# Altium PCB QTRX_PCB_Demo_FireFly_1p3Lens.PcbDoc
Units mil, origin at the board's own origin, x right, y up, seen from the top; angles counter-clockwise.
Board outline 630.74 x 411.45 mil, 6 copper layers (Top Layer, GND1, VCC(2V5), signal_VCC1V2, GND2, Bottom Layer), stack 37.5 mil thick; 33 components, 47 nets, 157 pads, 52 vias.
Unrouted connection lines stored in the file: 40.
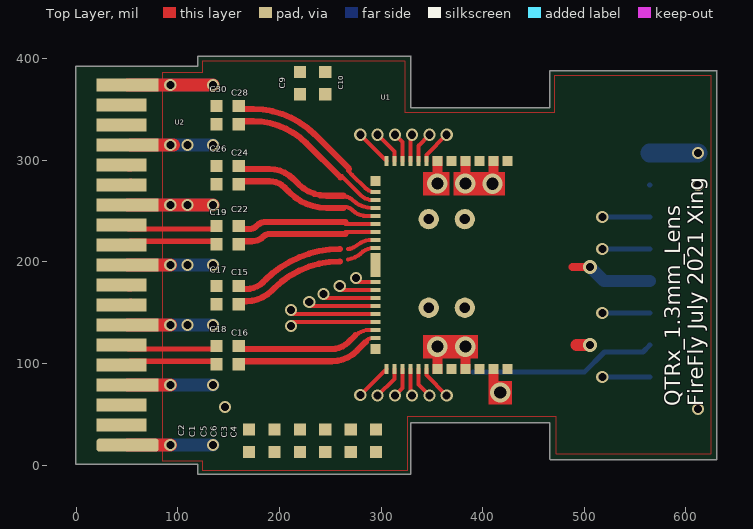
[diagram p0: Top Layer view]
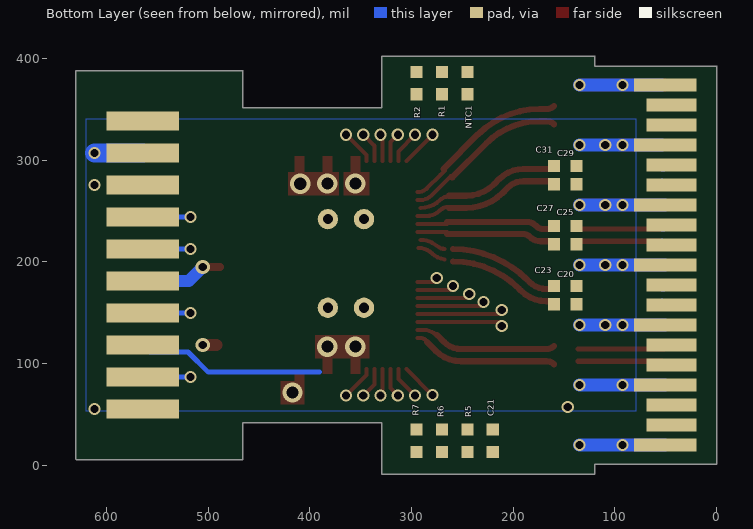
[diagram p1: Bottom Layer view, seen from below]
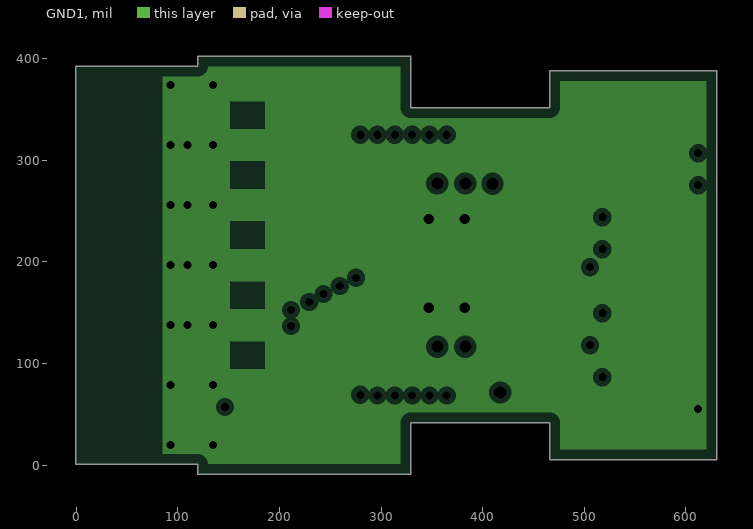
[diagram p2: GND1, clearances drawn from the general rule]
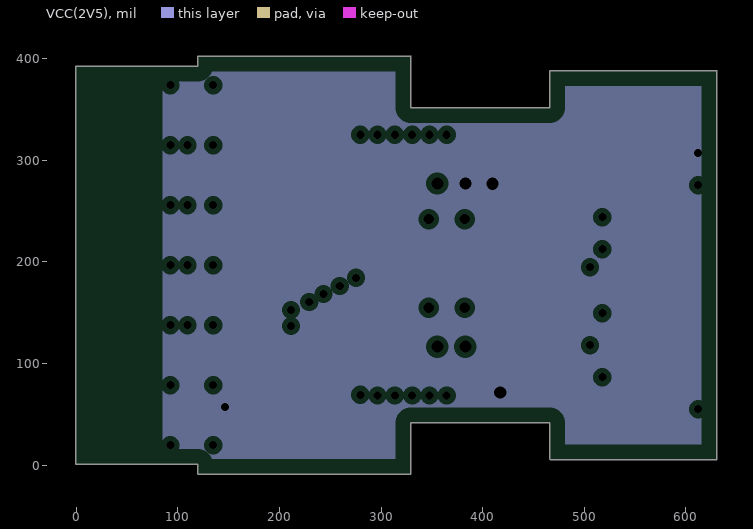
[diagram p3: VCC(2V5), clearances drawn from the general rule]
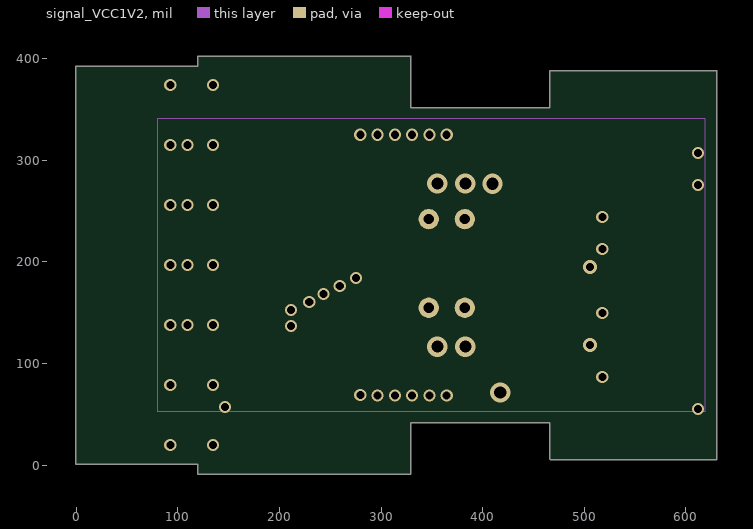
[diagram p4: signal_VCC1V2]
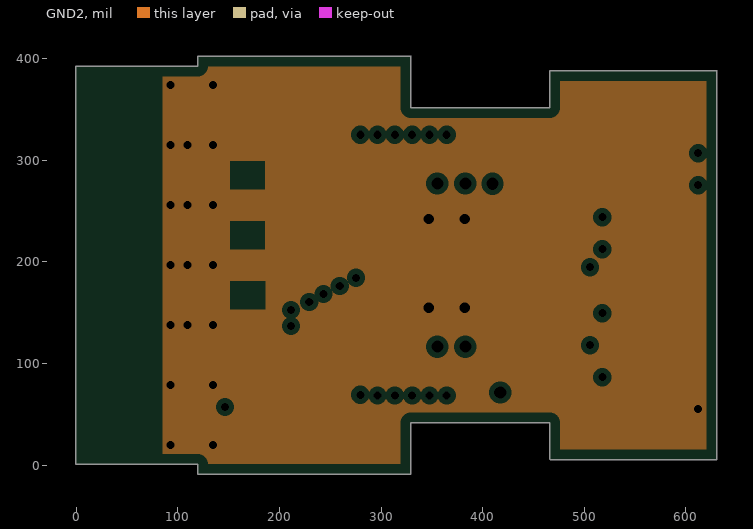
[diagram p5: GND2, clearances drawn from the general rule]

## Layer stack, top to bottom
Top Solder: solder mask 0.7, Solder Resist, Dk 3.5
Top Layer: signal copper 1.65
Dielectric 1: core 4, CORE NPG 186, Dk 4.6
GND1: plane copper 0.6, net GND
Dielectric 2: prepreg 8.3, PREPREG 7628HR, Dk 4.1
VCC(2V5): plane copper 1.2, net VCC2V5
Dielectric 3: dielectric 6, FR-4, Dk 4.8
signal_VCC1V2: signal copper 1.2
Dielectric 4: prepreg 8.3, PREPREG 7628HR, Dk 4.1
GND2: plane copper 0.6, net GND
Dielectric 5: core 4, CORE NPG 186, Dk 4.6
Bottom Layer: signal copper 1.65
Bottom Solder: solder mask 0.7, Solder Resist, Dk 3.5

## Board outline
0,0.97 119.67,0.97 119.67,-8.46 ccw(c120.08,-8.46) 120.08,-8.87 328.74,-8.87 ccw(c328.74,-8.46) 329.15,-8.46 329.15,41.91 466.13,41.91 466.13,5.91 ccw(c466.54,5.91) 466.54,5.5 629.92,5.5 ccw(c629.92,5.91) 630.33,5.91 630.33,387.8 ccw(c629.92,387.8) 629.92,388.2 466.54,388.2 ccw(c466.54,387.8) 466.13,387.8 466.13,351.79 329.15,351.79 329.15,402.17 ccw(c328.74,402.17) 328.74,402.57 120.08,402.57 ccw(c120.08,402.17) 119.67,402.17 119.67,392.73 0,392.73 ccw(c0,392.32) -0.41,392.32 -0.41,1.38 ccw(c0,1.38)

## Design rules (kind name [scope] priority, off if disabled: settings)
Clearance Clearance_1 [InPolygon and InNet('GND') vs InAnyDifferentialPair] p1: gap=10 ignorepadtopadclearanceinfootprint=TRUE
Clearance Clearance_2 [InPolygon and InNet('GND') vs InNet('DIS') or InNet('RSTN') or InNet('SCL') or InNet('SDA') or InNet('A5_1') or InNet('A5_2') or InNet('A6_1') or InNet('A6_2')] p2: gap=5.2 ignorepadtopadclearanceinfootprint=TRUE
Clearance [All] p3: gap=5 ignorepadtopadclearanceinfootprint=TRUE
DiffPairsRouting [All] p1: maxlimit=6 minlimit=6 mostfreqgap=6 toplayer_minwidth=6 toplayer_maxwidth=6 toplayer_prefwidth=6 midlayer1_minwidth=6 midlayer1_maxwidth=6 midlayer1_prefwidth=6 bottomlayer_minwidth=6 bottomlayer_maxwidth=6 bottomlayer_prefwidth=6 maxuncoupledlength=500
HoleSize [All] p1: absolutevalues=TRUE maxlimit=120 minlimit=1 maxpercent=80.000 minpercent=20.000
HoleToHoleClearance [All] p1: gap=5 allowstackedmicrovias=TRUE
PlaneClearance [All] p1: clearance=5
PlaneConnect [All] p1: planeconnectstyle=Direct reliefexpansion=30 reliefentries=4 reliefconductorwidth=30 reliefairgap=5
PolygonConnect [All] p1: connectstyle=Direct reliefconductorwidth=10 reliefentries=4 polygonreliefangle="90 Angle" airgapwidth=10
RoutingVias [All] p1: holewidth=28 width=50 viastyle="Through Hole" minholewidth=28 minwidth=50 maxholewidth=28 maxwidth=50
SilkToSilkClearance [All] p1: silktosilkclearance=5
SilkToSolderMaskClearance [IsPad] p1: minsilkscreentomaskgap=5 clearancetoexposedcopper=TRUE
SolderMaskExpansion [All] p1: expansion=4 istentingtop=FALSE
Width [All] p1: maxlimit=5 minlimit=5 preferedwidth=5
23 further rules are at their usual default settings.

## Classes and differential pairs
differential pair RX4: +RX4_p -RX4_n
differential pair RX3: +RX3_p -RX3_n
differential pair RX2: +RX2_p -RX2_n
differential pair TX4: +TX4_p -TX4_n
differential pair TX3: +TX3_p -TX3_n
differential pair TX2: +TX2_p -TX2_n
differential pair TX1: +TX1_p -TX1_n
differential pair RX1: +RX1_p -RX1_n
differential pair TXc4: +TXc4_p -TXc4_n
differential pair TXc3: +TXc3_p -TXc3_n
differential pair TXc2: +TXc2_p -TXc2_n
differential pair TXc1: +TXc1_p -TXc1_n
differential pair RXc4: +RXc4_p -RXc4_n
differential pair RXc3: +RXc3_p -RXc3_n
differential pair RXc2: +RXc2_p -RXc2_n
differential pair RXc1: +RXc1_p -RXc1_n

## Components (designator, comment, footprint, x,y, rotation, side; value= is the part's Value field where it differs from the comment)
C1 "Cap 0.1uF" 0201_cap 195,35 r270 top value=0.1uF
C2 "Cap 1nF" 0201_cap 170,35 r270 top value=1nF
C3 "Cap 0.1uF" 0201_cap 270,35 r270 top value=0.1uF
C4 "Cap 1nF" 0201_cap 295,35 r270 top value=1nF
C5 "Cap 0.1uF" 0201_cap 220,35 r270 top value=0.1uF
C6 "Cap 1nF" 0201_cap 245,35 r270 top value=1nF
C9 "Cap 0.1uF" 0201_cap 220,365 r90 top value=0.1uF
C10 "Cap 1nF" 0201_cap 245,365 r90 top value=1nF
C15 "Cap 0.1uF" 0201-EAGLE 137.8,158.32 r0 top value=0.1uF
C16 "Cap 0.1uF" 0201-EAGLE 137.8,99.27 r0 top value=0.1uF
C17 "Cap 0.1uF" 0201-EAGLE 137.8,176.32 r0 top value=0.1uF
C18 "Cap 0.1uF" 0201-EAGLE 137.8,117.27 r0 top value=0.1uF
C19 "Cap 0.1uF" 0201-EAGLE 137.8,217.38 r0 top value=0.1uF
C20 "Cap 0.1uF" 0201-EAGLE 137.8,158.32 r0 bottom value=0.1uF
C21 "Cap semi 10 uF" 0201_cap 220,13 r90 bottom value=10uF
C22 "Cap 0.1uF" 0201-EAGLE 137.8,235.38 r0 top value=0.1uF
C23 "Cap 0.1uF" 0201-EAGLE 137.8,176.32 r0 bottom value=0.1uF
C24 "Cap 0.1uF" 0201-EAGLE 137.8,276.43 r0 top value=0.1uF
C25 "Cap 0.1uF" 0201-EAGLE 137.8,217.38 r0 bottom value=0.1uF
C26 "Cap 0.1uF" 0201-EAGLE 137.8,294.43 r0 top value=0.1uF
C27 "Cap 0.1uF" 0201-EAGLE 137.8,235.38 r0 bottom value=0.1uF
C28 "Cap 0.1uF" 0201-EAGLE 137.8,335.49 r0 top value=0.1uF
C29 "Cap 0.1uF" 0201-EAGLE 137.8,276.43 r0 bottom value=0.1uF
C30 "Cap 0.1uF" 0201-EAGLE 137.8,353.49 r0 top value=0.1uF
C31 "Cap 0.1uF" 0201-EAGLE 137.8,294.43 r0 bottom value=0.1uF
NTC1 "1k Thermistor" 0201-RES 245,387 r270 bottom value=1k
R1 "Res 0 Ohm" 0201_res 270,365 r90 bottom value=0
R2 "Res 0 Ohm,DNI" 0201_res 295,387 r270 bottom value="0, DNI"
R5 "Res 10k" 0201_res 245,13 r90 bottom value=10k
R6 "Res 0 Ohm,DNI" 0201_res 270,35 r270 bottom value="0, DNI"
R7 "Res 0 Ohm" 0201_res 295,35 r270 bottom value=0
U1 "QLDD_QTIA" QTTX_QTRX_1p3Lens 322.84,113.35 r0 top
U2 "UEC5_2_and_UCC8" ECUE-12-007-T1-FF-01-1_TOP_V2 0,-8.46 r0 top (schematic designator *)

## Footprints (in the part's own frame and the unit in brackets; to place one, negate y for a bottom-side part, rotate by r counter-clockwise, add the part's x,y. Pads: shape width x height; smd on the part's side, far side on the other; paste and mask are expansions set on the pad)
0201-EAGLE [mil]
  rect 12x12 smd: 1(0,0) 2(22,0)
  body extent -1,-6 23,6, height 12
0201-RES [mil]
  rect 12x12 smd: 1(0,0) 2(22,0)
  body extent 0,-6 23,6, height 9
0201_cap [mil] "0201_cap_3DModel"
  rect 12x12 smd: 1(0,0) 2(22,0)
  body extent -1,-6 23,6, height 11
0201_res [mil] "0201_res_3DModel"
  rect 12x12 smd: 1(0,0) 2(22,0)
  body extent 0,-6 24,6, height 9
ECUE-12-007-T1-FF-01-1_TOP_V2 [mm]
  rrect50% 1.56x0.33 smd: A1(1.28,0.715)
  rect 1.25x0.33 smd: A2(1.125,1.215) A3(1.125,1.715) A5(1.125,2.715) A6(1.125,3.215) A8(1.125,4.215) A9(1.125,4.715) A11(1.125,5.715) A12(1.125,6.215) A14(1.125,7.215) A15(1.125,7.715) A17(1.125,8.715) A18(1.125,9.215)
  rect 1.56x0.33 smd: A4(1.28,2.215) A7(1.28,3.715) A10(1.28,5.215) A13(1.28,6.715) A16(1.28,8.215) A19(1.28,9.715)
  rect 1.56x0.33 smd far side: B1(1.28,0.715) B4(1.28,2.215) B7(1.28,3.715) B10(1.28,5.215) B13(1.28,6.715) B16(1.28,8.215) B19(1.28,9.715)
  rect 1.25x0.33 smd far side: B2(1.125,1.215) B3(1.125,1.715) B5(1.125,2.715) B6(1.125,3.215) B8(1.125,4.215) B9(1.125,4.715) B11(1.125,5.715) B12(1.125,6.215) B14(1.125,7.215) B15(1.125,7.715) B17(1.125,8.715) B18(1.125,9.215)
  rect 1.81x0.47 smd far side: C1(14.335,1.615) C2(14.335,2.415) C3(14.335,3.215) C4(14.335,4.015) C5(14.335,4.815) C6(14.335,5.615) C7(14.335,6.415) C8(14.335,7.215) C9(14.335,8.015) C10(14.335,8.815)
QTTX_QTRX_1p3Lens [mm]
  rect 0.1x0.25 smd paste-0.254: 1(-0.45,-0.475) 2(-0.25,-0.475) 3(-0.05,-0.475) 4(0.15,-0.475) 5(0.35,-0.475) 6(0.55,-0.475) 19(0.55,4.725) 20(0.35,4.725) 21(0.15,4.725) 22(-0.05,4.725) 23(-0.25,4.725) 24(-0.45,4.725)
  rect 0.25x0.25 smd paste-0.254: 7(0.825,-0.475) 8(1.175,-0.475) 9(1.525,-0.475) 10(1.875,-0.475) 11(2.225,-0.475) 12(2.575,-0.475) 13(2.575,4.725) 14(2.225,4.725) 15(1.875,4.725) 16(1.525,4.725) 17(1.175,4.725) 18(0.825,4.725) 25(-0.725,4.225) 43(-0.725,0.025)
  round 0.508 hole 0.254 mask+0.102: 8(0.61,1.056) 8(0.61,3.272) 8(1.512,1.056) 8(1.512,3.272)
  rect 0.25x0.1 smd paste-0.254: 26(-0.725,3.95) 27(-0.725,3.75) 28(-0.725,3.55) 29(-0.725,3.35) 30(-0.725,3.15) 31(-0.725,2.95) 32(-0.725,2.75) 33(-0.725,2.55) 35(-0.725,1.7) 36(-0.725,1.5) 37(-0.725,1.3) 38(-0.725,1.1) 39(-0.725,0.9) 40(-0.725,0.7) 41(-0.725,0.5) 42(-0.725,0.3)
  rect 0.25x0.6 smd paste-0.254: 34(-0.725,2.125)
  body extent -2.7,-1.62 21.97,5.88, height 1.3

## Part data
C1 C2 C3 C4 C5 C6 C9 C10 C15 C16 C17 C18 C19 C20 C21 C22 C23 C24 C25 C26 C27 C28 C29 C30 C31: library part Cap, "Capacitor", LatestRevisionDate=17-Jul-2002, LatestRevisionNote="Re-released for DXP Platform.", PackageReference=RAD-0.3, Published=8-Jun-2000, Publisher="Altium Limited"
NTC1: library part Res3, "Murata NCP03XM102E05RL", LatestRevisionDate=04-Mar-2005, LatestRevisionNote="PCB Footprint replaced.", PackageReference=J1-0603, Published=8-Jun-2000, Publisher="Altium Limited"
R1 R7: library part Res3_2, "Resistor", LatestRevisionDate=04-Mar-2005, LatestRevisionNote="PCB Footprint replaced.", PackageReference=J1-0603, Published=8-Jun-2000, Publisher="Altium Limited"
R2 R6: library part Res3_3, "Resistor", LatestRevisionDate=04-Mar-2005, LatestRevisionNote="PCB Footprint replaced.", PackageReference=J1-0603, Published=8-Jun-2000, Publisher="Altium Limited"
R5: library part Res3, "Resistor", LatestRevisionDate=04-Mar-2005, LatestRevisionNote="PCB Footprint replaced.", PackageReference=J1-0603, Published=8-Jun-2000, Publisher="Altium Limited"

## Via types
v1: diameter 12, hole 8, Top Layer to Bottom Layer, tented both sides, 44 vias
v2: diameter 20, hole 12, Top Layer to Bottom Layer, tented both sides, 4 vias
v3: diameter 20, hole 12, Top Layer to Bottom Layer, tented top, 2 vias
v4: diameter 14, hole 8, Top Layer to Bottom Layer, tented both sides, 2 vias

## Nets (pads, with @x,y where several pads share a name; then routed paths per layer and width w, separated by ;. In a path a pad name is that pad's centre, name@x,y a point inside that pad or via, vN(x,y) a via of type N, cw(c..) or ccw(c..) an arc to the next point about the centre after c; other vN are vias at no path point)
A5_1: R2.2 U1.20 | length 30.5
  Top Layer w4: U1.20@336.61,299.21 336.61,314.32 v1(347.5,325.21)
A5_2: R7.1 U1.5 | length 30.5
  Top Layer w4: U1.5@336.61,94.49 336.61,79.38 v1(347.5,68.49)
A6_1: R1.1 U1.19 | length 34.3
  Top Layer w4: U1.19@344.49,299.21 344.49,305.2 v1(364.5,325.21)
A6_2: R6.1 U1.6 | length 34.3
  Top Layer w4: U1.6@344.49,94.49 344.49,88.5 v1(364.5,68.49)
DIS: U1.24 U2.C7 | length 83.3
  Top Layer w4: v1(279.5,325.21) 279.5,324.83 U1.24@305.12,299.21
  Bottom Layer w5: v1(517.7,244.09) U2.C7
GND: C1.1 C2.1 C3.1 C4.1 C5.1 C6.1 C9.1 C10.1 C21.2 NTC1.2 U1.8 U1.10 U1.12 U1.13 U1.15 U1.17 U1.25 U1.34 U1.43 U2.A1 U2.A4 U2.A7 U2.A10 U2.A13 U2.A16 U2.A19 U2.B1 U2.B4 U2.B7 U2.B10 U2.B13 U2.B16 U2.B19 U2.C1 U2.C10 | length 2236.2
  Top Layer w5: U2.A13@41,255.91 v1(92.5,255.91) ; v1(109.32,255.9) v1(92.5,255.91) ; v1(92.5,255.91) U2.A13 v1(92.5,255.91)
  Top Layer w12.99: U2.A1 v1(92.5,19.68) ; U2.A4 v1(92.5,78.74) ; U2.A7 v1(92.5,137.8) ; U2.A10 v1(92.5,196.85) ; U2.A13 v1(92.5,255.91) v1(134.61,255.91) ; U2.A19 v1(92.5,374.02) v1(134.61,374.02) ; U2.A16@53.57,314.96 v1@95.67,314.96 ; v1(92.5,314.96) v1@95.67,314.96 ; v1(92.5,314.96) v1@95.67,314.96 ; v1(92.5,314.96) v1@95.67,314.96 ; v1(134.61,255.91) v1(109.32,255.9) v1(134.61,255.91)
  Bottom Layer w12.99: U2.B1 v1(134.61,19.68) ; U2.B4 v1(134.61,78.74) ; U2.B7 v1(134.61,137.8) ; U2.B10 v1(134.61,196.85) ; U2.B13 v1(92.5,255.91) v1(134.61,255.91) ; U2.B16@53.57,314.96 v1(134.61,314.96) ; U2.B19@53.57,374.02 v1(92.5,374.02) v1(134.61,374.02) ; v1(92.5,19.68) v1(134.61,19.68) ; v1(92.5,19.68) v1(134.61,19.68) ; v1(92.5,19.68) v1(134.61,19.68) ; v1(92.5,78.74) v1(134.61,78.74) ; v1(92.5,78.74) v1(134.61,78.74) ; v1(92.5,78.74) v1(134.61,78.74) ; v1(92.5,137.8) v1(134.61,137.8) ; v1(92.5,137.8) v1(134.61,137.8) ; v1(92.5,137.8) v1(134.61,137.8) ; v1(92.5,196.85) v1(134.61,196.85) ; v1(92.5,196.85) v1(134.61,196.85) ; v1(92.5,196.85) v1(134.61,196.85) ; v1(92.5,314.96) v1(134.61,314.96) ; v1(92.5,314.96) v1(134.61,314.96) ; v1(92.5,314.96) v1(134.61,314.96) ; v1(109.32,137.79) v1(134.61,137.8) ; v1(109.32,137.79) v1(134.61,137.8) ; v1(109.32,137.79) v1(134.61,137.8) ; v1(109.32,137.79) v1(134.61,137.8) ; v1(109.32,137.79) v1(134.61,137.8) ; v1(109.32,196.85) v1(134.61,196.85) ; v1(109.32,196.85) v1(134.61,196.85) ; v1(109.32,196.85) v1(134.61,196.85) ; v1(109.32,196.85) v1(134.61,196.85) ; v1(109.32,196.85) v1(134.61,196.85) ; v1(109.32,314.96) v1(134.61,314.96) ; v1(109.32,314.96) v1(134.61,314.96) ; v1(109.32,314.96) v1(134.61,314.96) ; v1(109.32,314.96) v1(134.61,314.96) ; v1(109.32,314.96) v1(134.61,314.96) ; v1(134.61,255.91) v1(109.32,255.9) v1(134.61,255.91)
  other v1: 612,55.12
HV: C3.2 C4.2 U2.C5 | length 81.8
  Top Layer w7.87: 488.31,194.88 v4(505.57,194.88)
  Bottom Layer w12: v4(505.57,194.88) 519.35,181.1 U2.C5
PDC1:  | length 13.3
  Top Layer w12: 492.27,118.11 v4(505.57,118.11)
RSSI: U1.4 U2.C2 | length 73.4
  Top Layer w4: U1.4@328.74,94.49 328.74,70.25 v1(330.5,68.49)
  Bottom Layer w5: v1(517.7,86.61) U2.C2
RSTN: C21.1 R5.2 U1.1 U1.23 U2.C6 | length 115.5
  Top Layer w4: v1@279.65,69.02 U1.1@305.12,94.49 ; v1(296.5,325.21) 312.99,308.72 U1.23@312.99,299.21
  Bottom Layer w5: v1(517.7,212.6) U2.C6
  other v1: 279.5,69.16
RX1_n: C16.1 U2.A5 | length 93
  Top Layer w5: U2.A5 cw(c53.57,89.15) 53.57,102.27 C16.1@136.25,102.27
RX1_p: C18.1 U2.A6 | length 93
  Top Layer w5: U2.A6 ccw(c53.57,127.39) 53.57,114.27 C18.1@136.25,114.27
RX2_n: C20.1 U2.B8 | length 10.3
  Bottom Layer w5: U2.B8 cw(c53.57,148.2) U2.B8@53.57,161.32
RX2_p: C23.1 U2.B9 | length 10.3
  Bottom Layer w5: U2.B9 ccw(c53.57,186.44) U2.B9@53.57,173.32
RX3_n: C25.1 U2.B11 | length 10.3
  Bottom Layer w5: U2.B11 cw(c53.57,207.26) U2.B11@53.57,220.38
RX3_p: C27.1 U2.B12 | length 10.3
  Bottom Layer w5: U2.B12 ccw(c53.57,245.5) U2.B12@53.57,232.38
RX4_n: C29.1 U2.B14 | length 10.3
  Bottom Layer w5: U2.B14 cw(c53.57,266.31) U2.B14@53.57,279.43
RX4_p: C31.1 U2.B15 | length 10.3
  Bottom Layer w5: U2.B15 ccw(c53.57,304.55) U2.B15@53.57,291.43
RXc1_n: C16.2 U1.42 | length 142.4
  Top Layer w4: 284.94,122.3 cw(c291.84,115.39) 291.84,125.16 U1.42
  Top Layer w6: C16.2 cw(c167.04,92.02) 167.04,102.27 251.46,102.27 ccw(c251.46,137.27) 276.21,112.52 284.94,121.25
RXc1_p: C18.2 U1.41 | length 140.3
  Top Layer w3.94: 287.77,133.03 U1.41
  Top Layer w4: 275.86,128.1 cw(c287.77,116.19) 287.77,133.03
  Top Layer w6: C18.2 ccw(c167.04,124.51) 167.04,114.27 251.42,114.27 ccw(c251.42,137.35) 267.75,121.03 274.82,128.1
RXc2_n: C20.2 U1.40 | length 83.1
  Top Layer w4: v1@211.24,140.91 U1.40
  other v1: 211.24,136.94
RXc2_p: C23.2 U1.39 | length 83.1
  Top Layer w4: v1@211.24,148.78 U1.39
  other v1: 211.24,152.74
RXc3_n: C25.2 U1.38 | length 65.1
  Top Layer w4: v1@229.24,156.65 U1.38
  other v1: 229.24,160.65
RXc3_p: C27.2 U1.37 | length 51.1
  Top Layer w4: v1@243.24,164.53 U1.37
  other v1: 243.24,168.53
RXc4_n: C29.2 U1.36 | length 34.9
  Top Layer w4: v1@259.32,172.4 269.27,172.4 ; 269.32,172.4 U1.36
  other v1: 259.24,176.4
RXc4_p: C31.2 U1.35 | length 19.5
  Top Layer w4: v1@274.77,180.28 U1.35
  other v1: 275.24,184.3
SCL: U1.2 U1.22 U2.C4 | length 108.6
  Top Layer w4: v1(296.5,68.49) 312.99,84.98 U1.2@312.99,94.49 ; v1(313.5,325.21) 320.87,317.85 U1.22@320.87,299.21
  Bottom Layer w5: v1(517.7,149.61) U2.C4
SDA: U1.3 U1.21 U2.C3 | length 240.6
  Top Layer w4: v1(313.5,68.49) 320.87,75.85 U1.3@320.87,94.49 ; U1.21@328.74,299.21 328.74,323.45 v1(330.5,325.21)
  Bottom Layer w5: 390.62,91.46 500.03,91.46 519.93,111.36 557.62,111.36 U2.C3
TH: NTC1.1 U2.B2
TX1_n: C15.1 U2.A8 | length 10.3
  Top Layer w5: U2.A8 cw(c53.57,148.2) U2.A8@53.57,161.32
TX1_p: C17.1 U2.A9 | length 10.3
  Top Layer w5: U2.A9 ccw(c53.57,186.44) U2.A9@53.57,173.32
TX2_n: C19.1 U2.A11 | length 93
  Top Layer w5: U2.A11 cw(c53.57,207.26) 53.57,220.38 C19.1@136.25,220.38
TX2_p: C22.1 U2.A12 | length 93
  Top Layer w5: U2.A12 ccw(c53.57,245.5) 53.57,232.38 C22.1@136.25,232.38
TX3_n: C24.1 U2.A14 | length 10.3
  Top Layer w5: U2.A14 cw(c53.57,266.31) U2.A14@53.57,279.43
TX3_p: C26.1 U2.A15 | length 10.3
  Top Layer w5: U2.A15 ccw(c53.57,304.55) U2.A15@53.57,291.43
TX4_n: C28.1 U2.A17
TX4_p: C30.1 U2.A18
TXc1_n: C15.2 U1.33 | length 141
  Top Layer w4: 267.42,202.3 ccw(c263.08,226.92) 280.39,208.89 ; 279.5,208.08 cw(c293.17,194.42) U1.33@293.17,213.74
  Top Layer w6: C15.2 cw(c167.04,151.08) 167.04,161.32 167.24,161.32 ccw(c167.24,196.87) 192.37,171.73 194.29,173.65 cw(c259.24,108.7) 259.24,200.56
TXc1_p: C17.2 U1.32 | length 136.6
  Top Layer w4: 267.48,212.8 ccw(c267.42,222.8) 272.42,214.14 279.9,218.85 cw(c290.46,200.56) U1.32@290.96,221.68
  Top Layer w6: C17.2 ccw(c167.04,183.57) 167.04,173.32 167.15,173.32 ccw(c167.15,197.07) 183.95,180.28 185.88,182.21 cw(c259.14,108.94) 259.14,212.56 259.24,212.56
TXc2_n: C19.2 U1.31 | length 137.3
  Top Layer w4: 265,229.49 U1.31
  Top Layer w6: C19.2 160.31,217.89 cw(c166.31,211.89) 166.31,220.38 172.97,220.38 ccw(c172.97,235.91) 183.95,224.93 cw(c189.98,218.9) 189.98,227.42 200,227.42 265,227.42
TXc2_p: C22.2 U1.30 | length 137.4
  Top Layer w4: 265,237.36 U1.30
  Top Layer w6: C22.2 160.31,234.86 ccw(c166.31,240.86) 166.31,232.38 170.37,232.38 ccw(c170.37,242.18) 177.3,235.25 177.95,235.9 cw(c186.46,227.39) 186.46,239.42 200,239.42 265,239.42
TXc3_n: C24.2 U1.29 | length 141.2
  Top Layer w4: 264.11,253.99 cw(c264.11,242.69) 271.94,250.84 ; 271.98,250.8 ccw(c285.4,264.22) 285.4,245.24 ; 285.44,245.24 U1.29
  Top Layer w6: C24.2@162.04,279.43 189.98,279.43 cw(c189.98,258.03) 205.12,273.16 208.73,269.55 ; 208.77,269.51 cw(c246.12,306.95) 208.73,269.55 ; 263,253.18 246.07,253.18 cw(c246.07,303.8) 210.27,268.01 208.73,269.55
TXc3_p: C26.2 U1.28 | length 138.7
  Top Layer w4: 263.92,264.29 cw(c263.92,252.99) 271.91,260.98 ccw(c290.92,279.99) U1.28@290.92,253.11
  Top Layer w6: C26.2@162.04,291.43 190.06,291.43 cw(c190.06,258.22) 213.54,281.71 218.7,276.55 ccw(c246.15,304.01) 246.15,265.18 263,265.18
TXc4_n: C28.2 U1.27 | length 165.8
  Top Layer w3.94: 272.94,272.81 280.25,265.5 ccw(c291.16,276.43) U1.27@291.16,260.98 ; U1.27@291.16,260.98 U1.27 U1.27@291.16,260.98
  Top Layer w4: 261.44,284.31 272.94,272.81
  Top Layer w6: C28.2 cw(c167.04,328.25) 167.04,338.49 174.12,338.49 cw(c174.12,264.77) 226.24,316.9 259.98,283.16
TXc4_p: C30.2 U1.26 | length 165.3
  Top Layer w3.94: 271.91,285.29 284.13,273.07 ccw(c294.31,283.26) U1.26
  Top Layer w4: 267.2,289.93 271.85,285.29
  Top Layer w6: C30.2 ccw(c167.04,360.73) 167.04,350.49 174.25,350.49 cw(c174.25,265.09) 234.64,325.48 268.47,291.64
VCC1V2: C1.2 C2.2 R1.2 R2.1 R5.1 R6.2 R7.2 U1.7 U1.9 U1.18 U2.C8 | length 0
  other v1: 612,275.59
  other v2: 382.87,116.66
  other v3: 355.32,116.66 355.32,277.16
VCC2V5: C5.2 C6.2 C9.2 C10.2 U1.11 U1.14 U1.16 U2.C9 | length 47.6
  Bottom Layer w18.5: U2.C9 v1(612,307.09)
  other v1: 146.28,57.21
  other v2: 417.18,71.56 382.87,277.16 409.55,276.95
pads on no net: U2.A2 U2.A3 U2.B3 U2.B5 U2.B6 U2.B17 U2.B18

## Polygon pours and split planes (outlines as drawn)
VCC1V2 on signal_VCC1V2 "NONET_L-01_P-001" (solid, pour order 14): 79.39,341.13 79.39,52.92 619,52.92 619,341.13
GND on Bottom Layer "Bottom Layer-GND" (solid, remove dead copper, pour order 12): 79.35,52.92 620,52.92 620,341.13 79.35,341.13
GND on Top Layer "NONET_L-01_P-001" (solid, pour order 18): 88,4.16 123.87,4.15 123.87,-5.21 326.31,-5.21 326.31,48.13 471.97,48.13 471.97,11.33 625.12,11.33 625.12,383.44 470.41,383.44 470.41,346.64 323.7,346.64 323.7,397.48 123.87,397.48 123.87,386.25 84.57,386.25 84.57,4.16
GND on GND2 (split plane): 319.06,351.79 319.41,349.18 320.41,346.74 322.02,344.65 324.11,343.05 326.54,342.04 329.15,341.7 466.13,341.7 468.74,342.04 471.17,343.05 473.26,344.65 474.86,346.74 475.87,349.18 476.21,351.79 476.21,378.12 620.24,378.12 620.24,15.58 476.21,15.58 476.21,41.91 475.87,44.52 474.86,46.96 473.26,49.05 471.17,50.65 468.74,51.66 466.13,52 329.15,52 326.54,51.66 324.11,50.65 322.02,49.05 320.41,46.96 319.41,44.52 319.06,41.91 319.06,1.21 129.72,1.21 129.41,3.58 128.4,6.01 126.8,8.1 124.71,9.7 122.28,10.71 119.67,11.06 84.39,11.06 84.39,382.65 119.67,382.65 122.28,382.99 124.71,384 126.8,385.6 128.4,387.69 129.41,390.12 129.72,392.49 319.06,392.49
VCC2V5 on VCC(2V5) (split plane): 314.08,351.79 314.37,348.85 315.22,346.02 316.62,343.41 318.49,341.13 320.78,339.25 323.38,337.86 326.21,337 329.15,336.71 466.13,336.71 469.07,337 471.89,337.86 474.5,339.25 476.78,341.13 478.66,343.41 480.05,346.02 480.91,348.85 481.2,351.79 481.2,373.13 615.26,373.13 615.26,20.57 481.2,20.57 481.2,41.91 480.91,44.85 480.05,47.68 478.66,50.29 476.78,52.57 474.5,54.45 471.89,55.84 469.07,56.7 466.13,56.99 329.15,56.99 326.21,56.7 323.38,55.84 320.78,54.45 318.49,52.57 316.62,50.29 315.22,47.68 314.37,44.85 314.08,41.91 314.08,6.2 133.76,6.2 133.6,6.74 132.2,9.34 130.33,11.63 128.04,13.5 125.44,14.89 122.61,15.75 119.67,16.04 84.39,16.04 84.39,377.66 119.67,377.66 122.61,377.95 125.44,378.81 128.04,380.2 130.33,382.07 132.2,384.36 133.6,386.96 133.76,387.5 314.08,387.5
GND on GND1 (split plane): 319.06,351.79 319.41,349.18 320.41,346.74 322.02,344.65 324.11,343.05 326.54,342.04 329.15,341.7 466.13,341.7 468.74,342.04 471.17,343.05 473.26,344.65 474.86,346.74 475.87,349.18 476.21,351.79 476.21,378.12 620.24,378.12 620.24,15.58 476.21,15.58 476.21,41.91 475.87,44.52 474.86,46.96 473.26,49.05 471.17,50.65 468.74,51.66 466.13,52 329.15,52 326.54,51.66 324.11,50.65 322.02,49.05 320.41,46.96 319.41,44.52 319.06,41.91 319.06,1.21 129.72,1.21 129.41,3.58 128.4,6.01 126.8,8.1 124.71,9.7 122.28,10.71 119.67,11.06 84.39,11.06 84.39,382.65 119.67,382.65 122.28,382.99 124.71,384 126.8,385.6 128.4,387.69 129.41,390.12 129.72,392.49 319.06,392.49

## Other copper
Top Layer:
  region net VCC2V5: 428.75,82.89 405.5,82.89 405.5,59.79 428.75,59.79
  region net VCC2V5: 415.4,90.49 405.5,90.49 405.5,72.14 415.4,72.14
  region net VCC1V2: 387.8,107.08 377.95,107.08 377.95,89.58 387.8,89.58
  region net VCC1V2: 360.28,117.58 350.38,117.58 350.38,89.58 360.28,89.58
  rectangle net VCC2V5: 377.9,285.97 387.8,304.07
  rectangle net VCC2V5: 405.5,286.62 415.35,304.12
  rectangle net VCC1V2: 341.35,265.52 367.1,288.37
  rectangle net VCC1V2: 350.35,276.12 360.25,304.12
  rectangle net VCC1V2: 341.35,105.02 395.15,127.87
  region net VCC2V5: 421.8,288.37 371.35,288.37 371.35,265.27 421.8,265.27
  pour cut-out: 0,392.32 84.39,392.32 84.39,1.56 84.57,1.38 0,1.38
  pour cut-out: 0,392.32 84.39,392.32 84.39,1.56 84.57,1.38 0,1.38
signal_VCC1V2:
  pour cut-out: 0,392.32 84.39,392.32 84.39,1.56 84.57,1.38 0,1.38
Bottom Layer:
  pour cut-out: 0,392.32 84.39,392.32 84.39,1.56 84.57,1.38 0,1.38
GND1 (plane layer: these items are gaps in the copper):
  pour cut-out: 185.63,121.67 185.63,94.72 151.48,94.72 151.48,121.67
  pour cut-out: 185.63,180.73 185.63,153.78 151.48,153.78 151.48,180.73
  pour cut-out: 185.65,239.84 185.65,212.89 151.5,212.89 151.5,239.84
  pour cut-out: 185.6,299.06 185.6,272.11 151.45,272.11 151.45,299.06
  pour cut-out: 185.6,357.88 185.6,330.93 151.45,330.93 151.45,357.88
  pour cut-out: 0,392.32 84.39,392.32 84.39,1.56 84.57,1.38 0,1.38
  pour cut-out: 41.8,210.36 75.95,210.36 75.95,183.46 41.8,183.46
  pour cut-out: 41.8,257.6 75.95,257.6 75.95,230.7 41.8,230.7
  pour cut-out: 41.8,304.85 75.95,304.85 75.95,277.95 41.8,277.95
GND2 (plane layer: these items are gaps in the copper):
  pour cut-out: 151.25,298.94 151.25,271.63 185.58,271.63 185.58,298.94
  pour cut-out: 151.41,180.75 151.41,153.44 185.74,153.44 185.74,180.75
  pour cut-out: 151.27,239.88 151.27,212.57 185.61,212.57 185.61,239.88
  pour cut-out: 0,392.32 84.39,392.32 84.39,1.56 84.57,1.38 0,1.38
  pour cut-out: 0,392.32 84.39,392.32 84.39,1.56 0,1.38
VCC(2V5) (plane layer: these items are gaps in the copper):
  pour cut-out: 0,392.32 84.39,392.32 84.39,1.56 84.57,1.38 0,1.38

## Silkscreen, mask and mechanical layers (free items; w line width, h text height)
Top Overlay:
  text "QTRx_1.3mm_Lens / FireFly July 2021 Xing" at 616.86,58.19 h15 r90
Top Solder:
  rectangle: 190.76,217.22 199.83,237.15
  rectangle: 190.76,220.38 203.01,237.15
  rectangle: 190.76,97.91 231.03,119.04
  rectangle: 190.76,156.97 231.03,178.09
  rectangle: 190.76,223.4 231.03,243.25
  rectangle: 190.76,275.08 223.1,296.2
  rectangle: 190.76,334.13 231.03,355.26
  rectangle: 274.75,92.75 394.9,112.7
  rectangle: 274.7,139.95 357.1,160.2
  rectangle: 274.7,187.05 350.15,206.75
  rectangle: 274.65,234.65 352.7,254.05
  rectangle: 274.5,281.65 389.4,301.05
  lines w0.79: 231.22,280.21 232.87,278.55
  lines w20: 342.7,197 352.63,197 ; 350.55,244.3 353.76,244.3 ccw(c353.76,259.49) 364.5,248.75 ; 352,151.05 ccw(c352,170.97) 366.08,156.88 395.03,185.83 cw(c400.15,180.71) 400.15,187.95 ; 352.35,196.85 ccw(c352.35,216.53) 366.26,202.61 384.39,220.74 cw(c392.5,212.63) 392.5,224.1 ; 362.7,247.55 ccw(c362.7,249.84) 364.32,248.22 366.18,250.08 cw(c387.6,228.65) 387.6,258.95
  lines w21: 218.11,285.63 cw(c218.11,267.1) 231.22,280.21
Mechanical 1:
  lines w0.79: 328.74,5.71 328.74,-8.46 ; 328.74,387.99 328.74,402.17 ; 328.74,-8.46 328.74,42.32 466.54,42.32 466.54,5.91 629.92,5.91 629.92,387.8 466.54,387.8 466.54,351.38 328.74,351.38 328.74,402.17 ; 328.74,-8.46 120.08,-8.46 120.08,1.38 0,1.38 0,392.32 120.08,392.32 120.08,402.17 328.74,402.17

## Dimensions
0,0 to 154.89,196.89 on Mechanical 2
-39.37,393.7 to -39.37,0 on Mechanical 3
0,-39.37 to 787.4,-39.37 on Mechanical 3